# Altium PCB Heist-It.PcbDoc
Units mil, origin at the board's own origin, x right, y up, seen from the top; angles counter-clockwise.
Board outline 6000 x 4000 mil, 2 copper layers (Top Layer, Bottom Layer); 32 components, 29 nets, 106 pads, 0 vias.
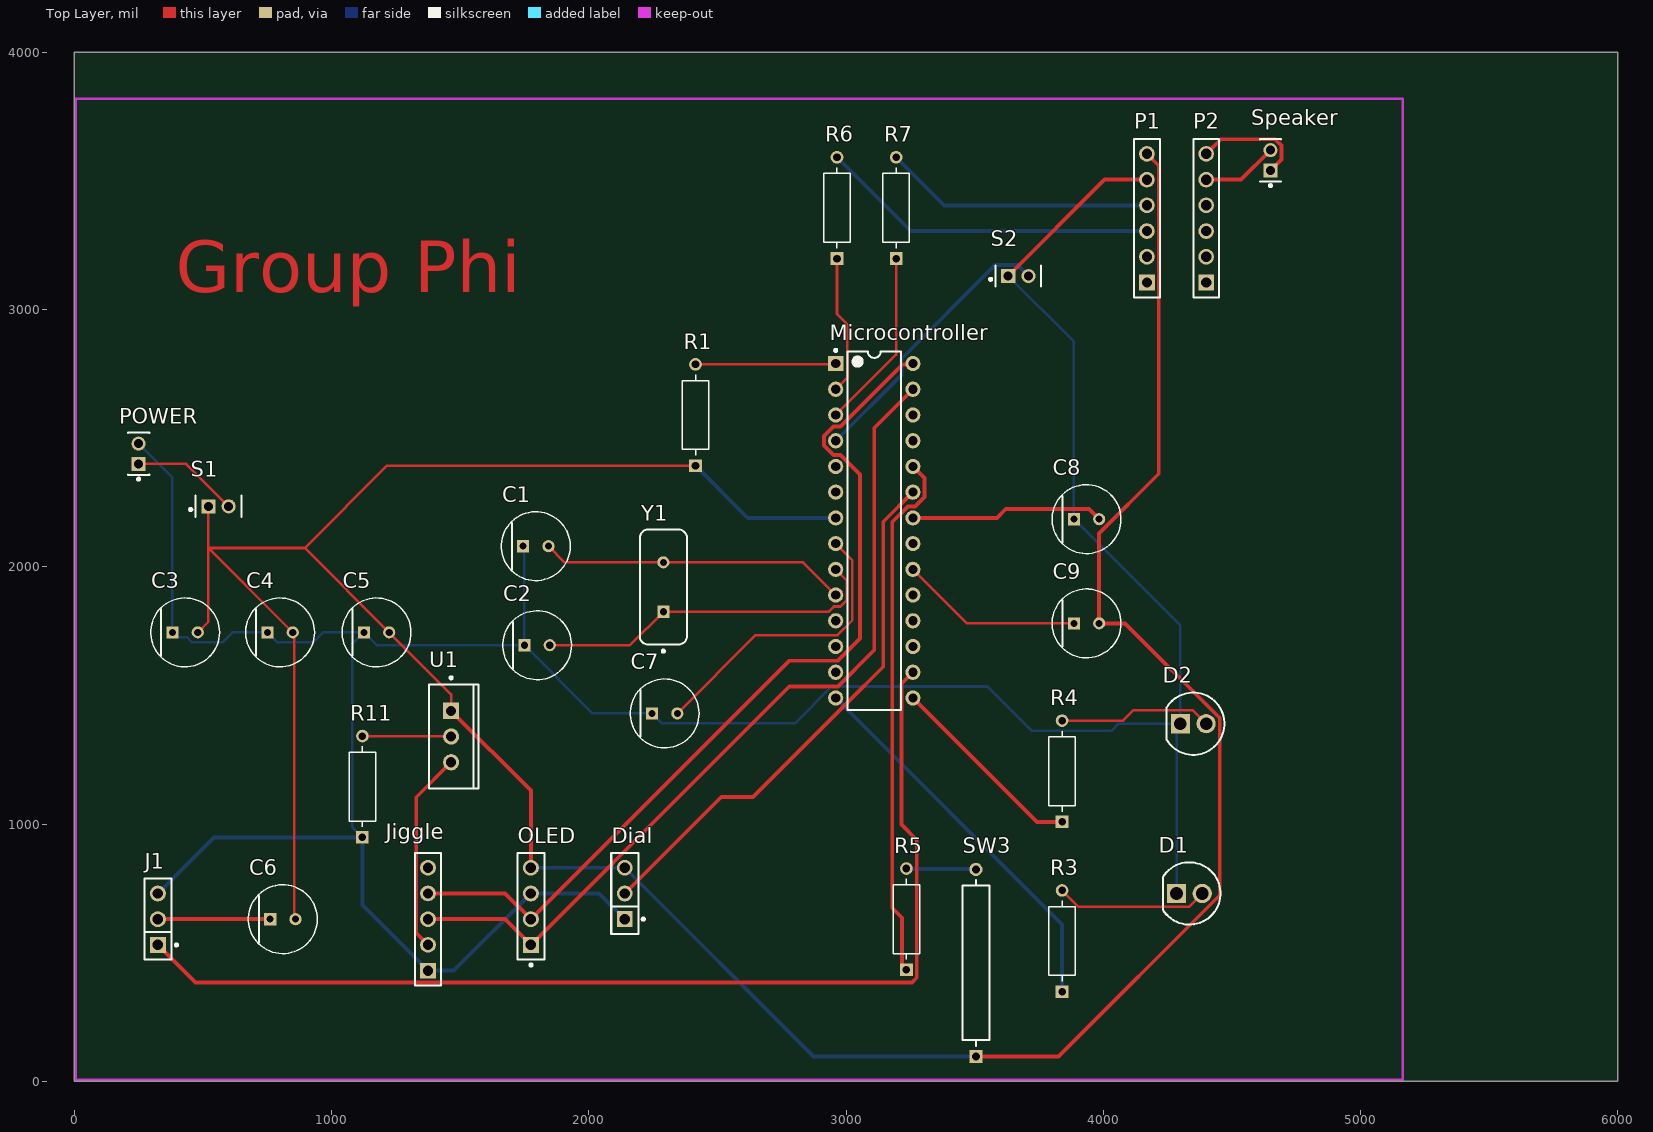
[diagram p0: Top Layer view]
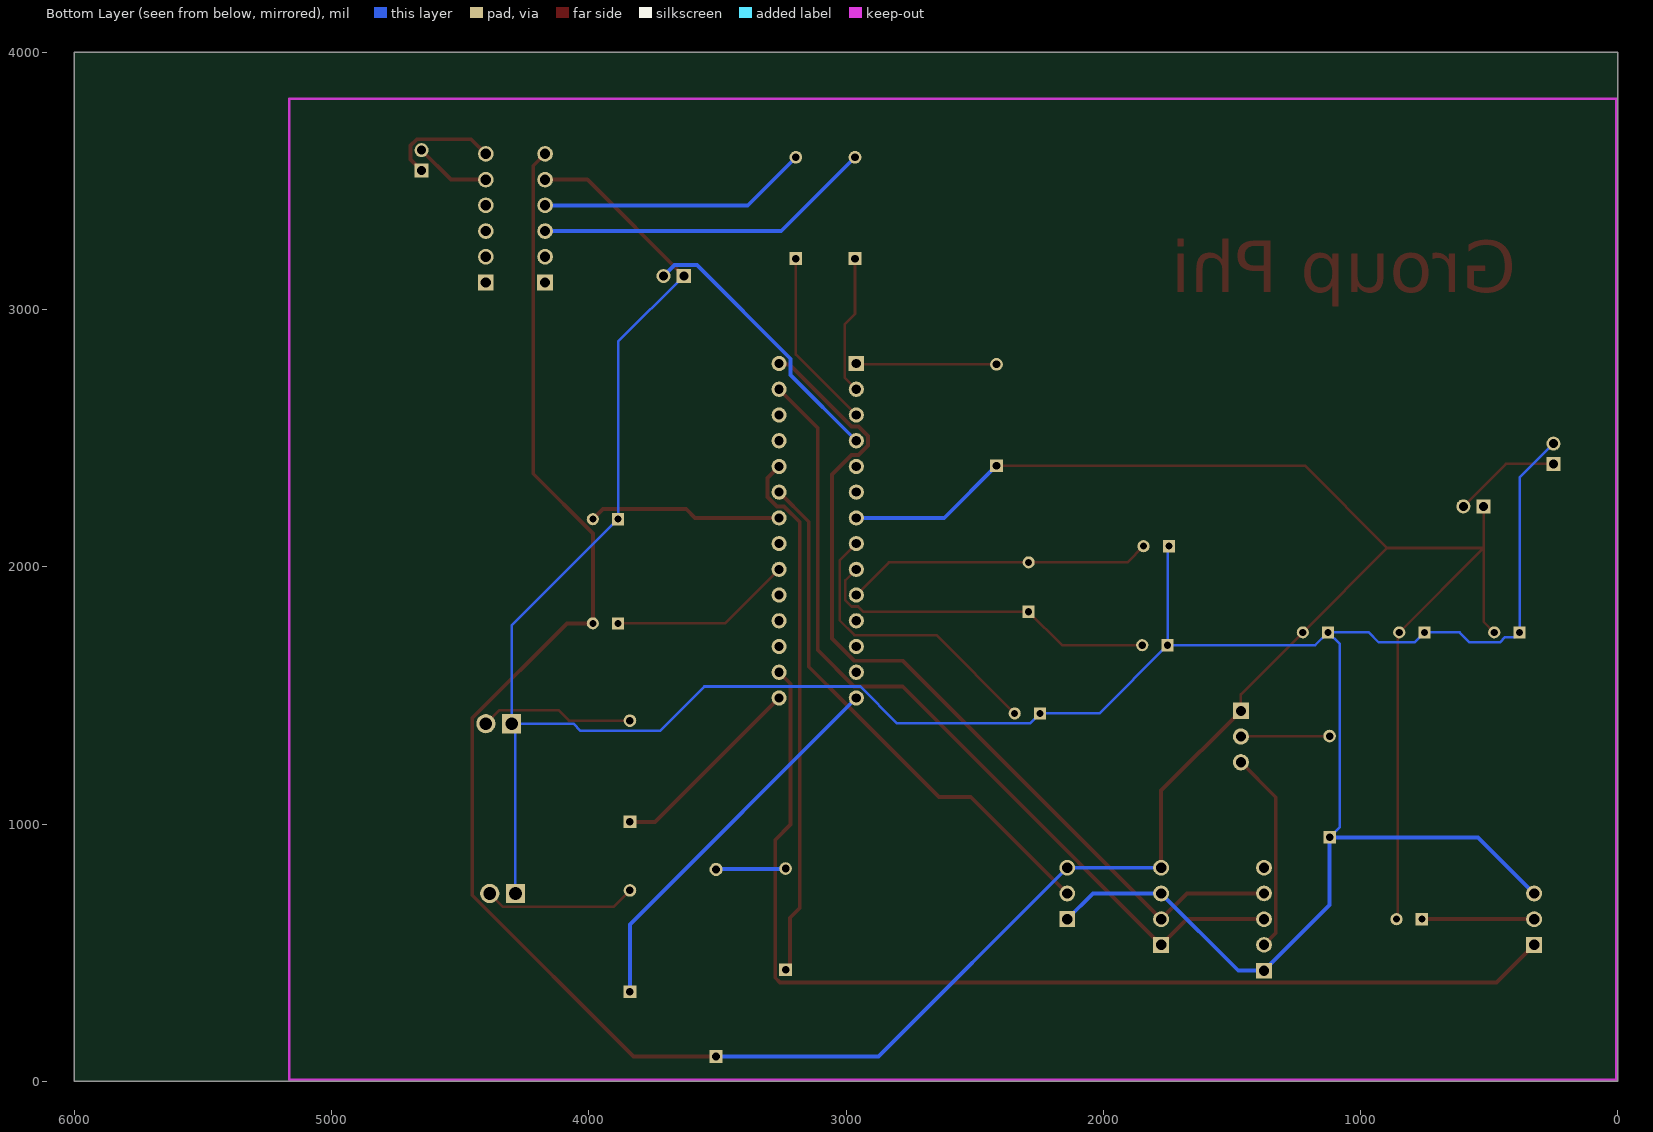
[diagram p1: Bottom Layer view, seen from below]
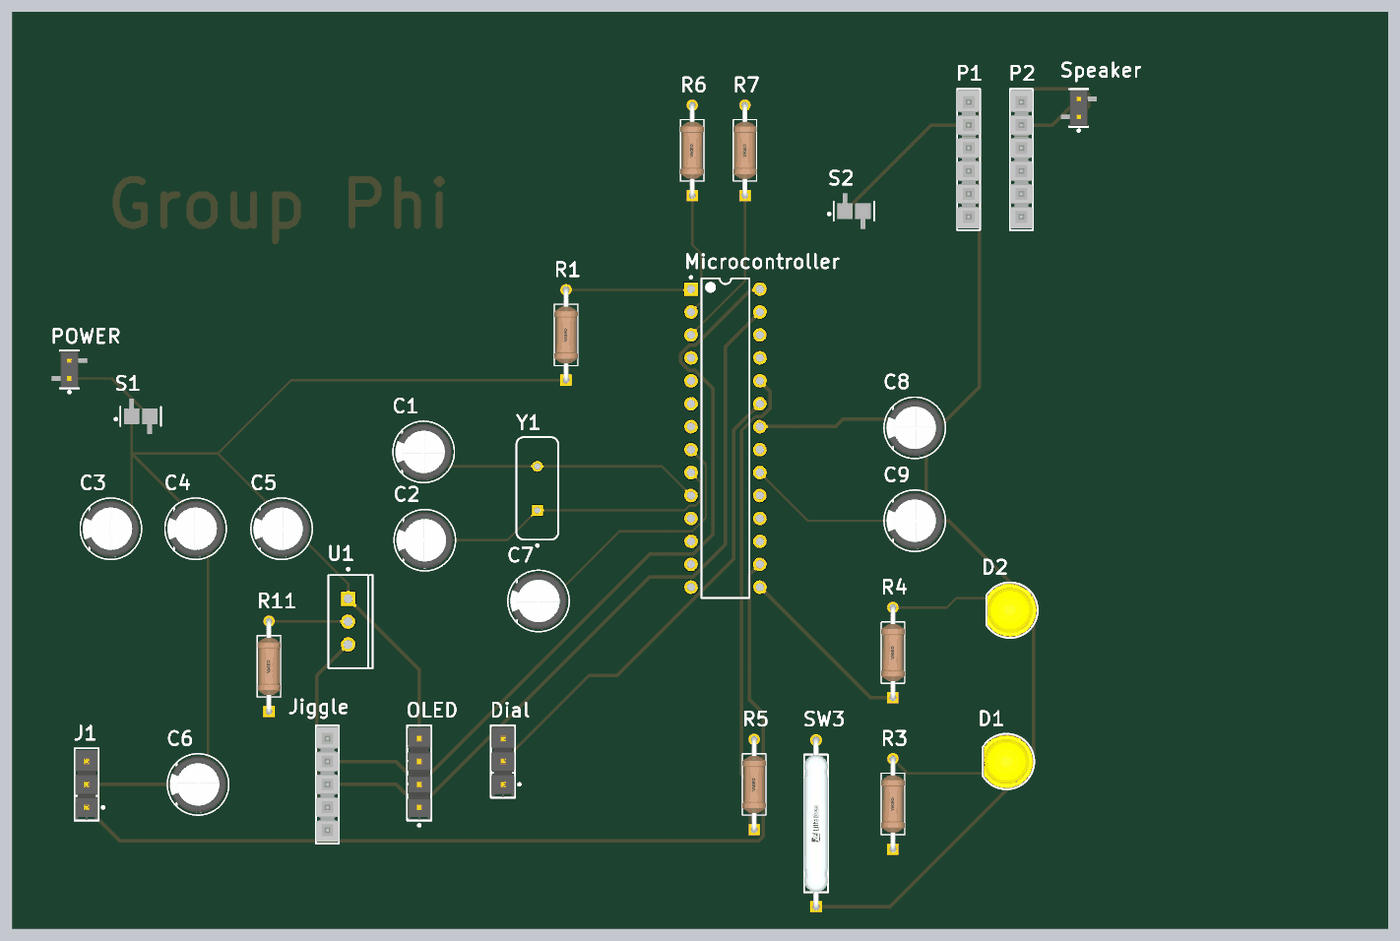
[diagram p2: 3D render of the assembled board from above, using the file's embedded part models]

## Layer stack, top to bottom
Top Solder: solder mask 0.4, Solder Resist, Dk 3.5
Top Layer: signal copper 1.4
Dielectric 1: dielectric 12.6, FR-4, Dk 4.8
Bottom Layer: signal copper 1.4
Bottom Solder: solder mask 0.4, Solder Resist, Dk 3.5

## Board outline
0,0 6000,0 6000,4000 0,4000

## Design rules (kind name [scope] priority, off if disabled: settings)
BoardOutlineClearance [All] p1: gap=11.81 ignorepadtopadclearanceinfootprint=FALSE except(15.75: Arc-SplitBarrior Arc-SplitContinuation Track-SplitBarrior Track-SplitContinuation SMDPad-SplitBarrior SMDPad-SplitContinuation THPad-SplitBarrior THPad-SplitContinuation Via-SplitBarrior Via-SplitContinuation Fill-SplitBarrior Fill-SplitContinuation Poly-SplitBarrior Poly-SplitContinuation Region-SplitBarrior Region-SplitContinuation Text-SplitBarrior Text-SplitContinuation)
Clearance "Clearance Different Nets" [All] p1: gap=7.87 ignorepadtopadclearanceinfootprint=FALSE except(3.5: Arc-Arc Arc-Track Arc-SMDPad Track-Track Track-SMDPad; 5: SMDPad-SMDPad SMDPad-Via THPad-Via Via-Via; 10: Arc-Via Arc-Text Track-Via Track-Text SMDPad-Text THPad-Text Via-Text Fill-Text Poly-Text Region-Text Text-Text; 19.68: THPad-THPad Via-Hole)
Clearance "Clearance Same Nets" [All] p2: gap=7.87 ignorepadtopadclearanceinfootprint=FALSE except(3.5: Arc-Arc Arc-Track Arc-SMDPad Track-Track Track-SMDPad SMDPad-SMDPad; 5: SMDPad-Via THPad-Via; 10: Arc-Via Arc-Text Track-Via Track-Text SMDPad-Text THPad-Text Via-Via Via-Text Fill-Text Poly-Text Region-Text Text-Text)
Clearance "Clearance Bottom Layer" [OnLayer('Bottom Layer')] p3: gap=8 ignorepadtopadclearanceinfootprint=TRUE except(10: Arc-Text Track-Text SMDPad-Text THPad-Text Via-Text Fill-Text Poly-Text Region-Text Text-Text)
Clearance "Clearance Top Layer" [OnLayer('Top Layer')] p4: gap=8 ignorepadtopadclearanceinfootprint=TRUE except(10: Arc-Text Track-Text SMDPad-Text THPad-Text Via-Text Fill-Text Poly-Text Region-Text Text-Text)
HoleSize [All] p1: absolutevalues=TRUE maxlimit=248.03 minlimit=7.87 maxpercent=80.000 minpercent=20.000
MinimumAnnularRing [All] p1: minimumring=5.12
MinimumSolderMaskSliver [All] p1: minsoldermaskwidth=3.94
PolygonConnect PolygonConnect_1 [All] p1: thpad.connectstyle=Relief thpad.reliefconductorwidth=20 thpad.reliefentries=4 thpad.polygonreliefangle="90 Angle" thpad.airgapwidth=10 smdpad.connectstyle=Relief smdpad.reliefconductorwidth=20 smdpad.reliefentries=4 smdpad.polygonreliefangle="90 Angle" smdpad.airgapwidth=10 via.connectstyle=Direct via.reliefconductorwidth=20 via.reliefentries=4 via.polygonreliefangle="90 Angle" via.airgapwidth=10
RoutingCorners [All] p1: cornerstyle=Round minsetback=100 maxsetback=100
RoutingVias [All] p1: holewidth=19.68 width=39.37 viastyle="Through Hole" minholewidth=7.87 minwidth=13.78 maxholewidth=39.37 maxwidth=78.74
SilkToSilkClearance [All] p1: silktosilkclearance=3.94
SilkToSolderMaskClearance [IsPad] p1: minsilkscreentomaskgap=3.94 clearancetoexposedcopper=TRUE
SolderMaskExpansion [All] p1: expansion=4 istentingtop=FALSE
Width [All] p1: maxlimit=100 minlimit=3.5 preferedwidth=15
25 further rules are at their usual default settings.

## Components (designator, comment, footprint, x,y, rotation, side; value= is the part's Value field where it differs from the comment)
C1 "22pF" FP-RAD-TH-D_6_3_0_5-L_11-MFG 1794.21,2080 r0 top
C2 "22pF" FP-RAD-TH-D_6_3_0_5-L_11-MFG 1799.21,1695 r0 top
C3 "100nF" FP-RAD-TH-D_6_3_0_5-L_11-MFG 430.79,1745 r0 top
C4 "10uF" FP-RAD-TH-D_6_3_0_5-L_11-MFG 800,1745 r0 top
C5 "100nF" FP-RAD-TH-D_6_3_0_5-L_11-MFG 1175,1745 r0 top
C6 "100nF" FP-RAD-TH-D_6_3_0_5-L_11-MFG 810.79,630 r0 top
C7 "100nF" FP-RAD-TH-D_6_3_0_5-L_11-MFG 2295,1430 r0 top
C8 "100nF" FP-RAD-TH-D_6_3_0_5-L_11-MFG 3935,2185 r0 top
C9 "100nF" FP-RAD-TH-D_6_3_0_5-L_11-MFG 3935,1780 r0 top
D1 "LED Green" FP-SSL-LX5093YD-MFG 4335,730 r0 top
D2 "LED Red" FP-SSL-LX5093YD-MFG 4350,1390 r0 top
Dial "Rotary Endocer" FP-TSW-103-14-G-S-MFG 2140,730 r90 top
J1 "Servo" FP-TSW-103-14-G-S-MFG 325,630 r90 top
Jiggle "VCNL4040" SMTC-TSW-105-05-X-S 1375,430 r90 top
Microcontroller "ATmega328P-PU" 28P3 3110,2140 r0 top
OLED "OLED" FP-TSW-104-22-G-S-MFG 1775,680 r90 top
P1 "DFPlayer Left" SMTC-TSW-106-17-X-S-LL 4170,3105 r90 top
P2 "DFPlayer Right" SMTC-TSW-106-17-X-S-LL 4400,3105 r90 top
POWER "Power" FP-TMM-102-03-F-S-MFG 250,2439.37 r90 top
R1 "10k" FP-FMP100-MFG 2415,2590 r90 top
R3 "1k" FP-FMP100-MFG 3840,545 r90 top
R4 "1k" FP-FMP100-MFG 3840,1205 r90 top
R5 "10k" FP-FMP100-MFG 3235,630 r90 top
R6 "1k" FP-FMP100-MFG 2965,3395 r90 top
R7 "1k" FP-FMP100-MFG 3195,3395 r90 top
R11 "1k" FP-FMP100-MFG 1120,1145 r90 top
S1 "POWER SWITCH" FP-TMM-102-04-G-S-MFG 560.63,2235 r0 top
S2 "ON/OFF BUTTON" FP-TMM-102-04-G-S-MFG 3670,3130 r0 top
Speaker "Speaker" FP-TMM-102-03-F-S-MFG 4650,3580 r90 top
SW3 "Reed Switch" FP-MLRR-3-17-23-MFG 3505,460 r90 top
U1 "3.3 volt regulator" ONSC-TO-220-3-221AB-01 1465,1340 r0 top
Y1 "16Mhz Crystal" FOX-FOXSLF160-20 2290,1921.06 r90 top

## Footprints (in the part's own frame and the unit in brackets; to place one, negate y for a bottom-side part, rotate by r counter-clockwise, add the part's x,y. Pads: shape width x height; smd on the part's side, far side on the other; paste and mask are expansions set on the pad)
28P3 [mm] "28-Pin Plastic Dual In-Line Package (PDIP)"
  rect 1.5x1.5 hole 0.9: 1(-3.81,16.51)
  round 1.5 hole 0.9: 2(-3.81,13.97) 3(-3.81,11.43) 4(-3.81,8.89) 5(-3.81,6.35) 6(-3.81,3.81) 7(-3.81,1.27) 8(-3.81,-1.27) 9(-3.81,-3.81) 10(-3.81,-6.35) 11(-3.81,-8.89) 12(-3.81,-11.43) 13(-3.81,-13.97) 14(-3.81,-16.51) 15(3.81,-16.51) 16(3.81,-13.97) 17(3.81,-11.43) 18(3.81,-8.89) 19(3.81,-6.35) 20(3.81,-3.81) 21(3.81,-1.27) 22(3.81,1.27) 23(3.81,3.81) 24(3.81,6.35) 25(3.81,8.89) 26(3.81,11.43) 27(3.81,13.97) 28(3.81,16.51)
  silkscreen extent -3.93,-17.7 2.65,17.93, body extent -3.6,-17.65 3.6,17.65, height 4.58
FOX-FOXSLF160-20 [mm] "THD, 2-Leads, Body 11.35x4.65mm"
  rect 1.2x1.2 hole 0.7: 1(-2.44,0)
  round 1.2 hole 0.7: 2(2.44,0)
  silkscreen extent -6.45,-2.32 5.68,2.32, body extent -5.67,-2.32 5.68,2.33, height 3.6
FP-FMP100-MFG [mm]
  rect 1.25x1.25 hole 0.75 paste-2539.97 mask+0: 1(-5,0)
  round 1.25 hole 0.75 paste-2539.97 mask+0: 2(5,0)
  silkscreen extent -3.98,-1.3 3.98,1.3, body extent -5.72,-1.4 5.72,1.4, height 0.25
FP-MLRR-3-17-23-MFG [mm]
  rect 1.3x1.3 hole 0.8 paste-2539.97 mask+0: 1(-9.23,0)
  round 1.3 hole 0.8 paste-2539.97 mask+0: 2(9.23,0)
  silkscreen extent -8.18,-1.33 8.18,1.33, body extent -9.98,-1.43 9.98,1.43, height 0.25
FP-RAD-TH-D_6_3_0_5-L_11-MFG [mm]
  rect 1.2x1.2 hole 0.7 paste-2539.97 mask+0: 1(-1.25,0)
  round 1.2 hole 0.7 paste-2539.97 mask+0: 2(1.25,0)
  silkscreen extent -3.4,-3.4 3.4,3.4, body extent -3.5,-3.5 3.5,3.5, height 0.25
FP-SSL-LX5093YD-MFG [mm]
  rect 1.9x1.9 hole 1.25 paste-2539.97 mask+0: 1(-1.27,0)
  round 1.9 hole 1.25 paste-2539.97 mask+0: 2(1.27,0)
  silkscreen extent -2.63,-3.07 3.07,3.07, body extent -3.17,-3.17 3.17,3.17, height 0.25
FP-TMM-102-03-F-S-MFG [mm]
  rect 1.39x1.39 hole 0.89 paste-2539.97 mask+0: 1(-1,0)
  round 1.39 hole 0.89 paste-2539.97 mask+0: 2(1,0)
  silkscreen extent -2.62,-1.05 2.1,1.05, body extent -2.1,-2.07 2.1,2.07, height 0.25
FP-TMM-102-04-G-S-MFG [mm]
  rect 1.39x1.39 hole 0.89 paste-2539.97 mask+0: 1(-1,0)
  round 1.39 hole 0.89 paste-2539.97 mask+0: 2(1,0)
  silkscreen extent -2.87,-1.05 2.25,1.05
FP-TSW-103-14-G-S-MFG [mm]
  rect 1.57x1.57 hole 1.02 paste-2539.97 mask+0: 1(-2.54,0)
  round 1.57 hole 1.02 paste-2539.97 mask+0: 2(0,0) 3(2.54,0)
  silkscreen extent -4,-1.95 4,1.34, body extent -4.1,-1.44 4.1,1.44, height 0.25
FP-TSW-104-22-G-S-MFG [mm]
  rect 1.57x1.57 hole 1.02 paste-2539.97 mask+0: 1(-3.81,0)
  round 1.57 hole 1.02 paste-2539.97 mask+0: 2(-1.27,0) 3(1.27,0) 4(3.81,0)
  silkscreen extent -5.92,-1.34 5.27,1.34, body extent -5.37,-1.44 5.37,1.44, height 0.25
ONSC-TO-220-3-221AB-01 [mm] "FM, 3-Leads, Body 10.3x4.85mm, Pitch 2.54mm"
  rect 1.6x1.6 hole 1: 1(0,2.54)
  round 1.6 hole 1: 2(0,0) 3(0,-2.54)
  silkscreen extent -2.18,-5.15 2.72,5.92, body extent -2.16,-5.15 2.69,5.15, height 19.68
SMTC-TSW-105-05-X-S [mm] ".025 SQ Post Terminal Strip Assembly, 1x5 Pins, Vertical, 2.54mm Pitch, Male"
  rect 1.55x1.55 hole 1.02: 1(0,0)
  round 1.55 hole 1.02: 2(2.54,0) 3(5.08,0) 4(7.62,0) 5(10.16,0)
  silkscreen extent -1.46,-1.27 11.62,1.27, body extent -1.27,-1.27 11.43,1.27, height 5.21
SMTC-TSW-106-17-X-S-LL [mm] ".025 SQ Post Terminal Strip Assembly, 1x6 Pins, Vertical, 2.54mm Pitch, Male"
  rect 1.55x1.55 hole 1.02: 1(0,0)
  round 1.55 hole 1.02: 2(2.54,0) 3(5.08,0) 4(7.62,0) 5(10.16,0) 6(12.7,0)
  silkscreen extent -1.46,-1.27 14.16,1.27, body extent -1.27,-1.27 13.97,1.27, height 18.29

## Part data
C1 C2 C3 C4 C5 C6 C7 C8 C9: library part CMP-05427-000779-1, "Aluminum Electrolytic Capacitors (Radial Lead Type) 2.2uF ±20% 250V", Capacitance=2.2uF, Case/Package=Radial, Max Operating Temperature=105°C, Min Operating Temperature=-25°C, Package Quantity=2000, Ripple Current=29mA, Tolerance=20%, Voltage Rating=250V, Diameter=6.3mm, Height=11.2mm, Height - Seated (Max)=0.48inch, Lead Diameter=0.5mm, Lead Pitch=2.5mm, Lead/Base Style=Straight, Length=11.2mm, Life (Hours)=2000Hour, Mount="Through Hole", Packaging="Ammo Pack", Radiation Hardening=No, Series=NHG, Termination=Radial, Voltage Rating (DC)=250V
D1 D2: library part CMP-57192-000007-1, "LED YELLOW DIFFUSED T-1 3/4 T/H", Case/Package=Radial, Color=Yellow, Forward Current=20mA, Forward Voltage=2.1V, Max Operating Temperature=85°C, Min Operating Temperature=-40°C, Package Quantity=1000, Diameter=5mm, Dominant Wavelength=568nm, Height=8.6mm, Illumination Color=Yellow, Lead Free="Lead Free", Length=0.5inch, Lens Color=Yellow, Lens Style=Dome, Lens Transparency=Diffused, Luminous Intensity=30mcd, Mount="Through Hole", Number of LEDs=1, Number of Pins=2, Packaging=Bulk, REACH SVHC="No SVHC", RoHS Compliant=Yes, Series=-, Test Current=20mA, Viewing Angle=60°, Wavelength=585nm, Weight=0.01lb, Width=1.5inch
Dial J1: library part CMP-02766-001743-1, "CONN HEADER VERT 3POS 2.54MM", Color=Black, Flammability Rating="UL94 V-0", Max Current Rating=7.6A, Max Operating Temperature=125°C, Max Voltage Rating (AC)=550V, Min Operating Temperature=-55°C, Package Quantity=1, Connector Type=Header, Contact Finish - Mating=GOLD, Contact Material=Bronze, Contact Mating Length=0.32inch, Contact Plating=Gold, Contact Shape=Square, Contact Type="Male Pin", Depth=2.54mm, Fastening Type=Pull, Gender=Male, Height=10.67mm, Housing Color=Black, Housing Material=Polyester, Insulation Color=Black, Insulation Material=PBT, Lead Free="Lead Free", Length=7.62mm, Mount="Through Hole", Number of Contacts=3, Number of Positions=3, Number of Rows=1, Orientation=Straight, Packaging=Bulk, Pitch=2.54mm, Radiation Hardening=No, REACH SVHC="No SVHC", RoHS Compliant=Yes, Series=TSW, Termination=Solder, Width=2.54mm
Jiggle: library part CMP-1024-00366-1, "0.025\" SQ Post Header, Through-hole, Vertical, -55 to 125 degC, 2.54 mm Pitch, 5-Pin, Male, RoHS", Manufacturer=Samtec, PartNumber=TSW-105-05-L-S, Temperature Range="-55 to 125 degC", ComponentLink1Description="Manufacturer URL", ComponentLink1URL=http://www.samtec.com, ComponentLink2Description=Datasheet, ComponentLink2URL=http://www.samtec.com/documents/webfiles/pdf/TSW_TH.PDF, ComponentLink3Description="Package Specification", ComponentLink3URL=http://www.samtec.com/documents/webfiles/cpdf/TSW-XXX-XX-XXX-X-XX-XXX-MKT.pdf, DatasheetVersion=F-214, Mounting Technology=Through-hole, Orientation=Vertical, PackageDescription=".025[0.64] SQ. Post Terminal Strip Assembly", PackageReference=TSW-105-05-X-S, PackageVersion="DM, 8/1988", Pitch="2.54 mm", RoHS=True
Microcontroller: library part CMP-0095-00013-2, "8-bit AVR Microcontroller, 32KB Flash, 1KB EEPROM, 2KB SRAM, 28-pin PDIP, Industrial Grade (-40°C to 85°C)", ComponentLink1Description="Manufacturer URL", ComponentLink1URL=http://www.atmel.com/, ComponentLink2Description="ATmega48A/48PA/88A/88PA/168A/168PA/328/328P Datasheet", ComponentLink2URL=http://www.atmel.com/dyn/resources/prod_documents/8271.pdf, ComponentLink3Description="ATmega48A/48PA/88A/88PA/168A/168PA/328/328P Summary", ComponentLink3URL=http://www.atmel.com/dyn/resources/prod_documents/8271S.pdf, DatasheetVersion="revD, May-2011", PackageDescription="28-lead (0.300\"/7.62mm Wide) Plastic Dual Inline Package (PDIP)", PackageReference=28P3, PackageVersion="revB, Sep-2001", RevisionNote="DatasheetVersion updated. URLs added."
OLED: library part CMP-02766-001236-1, "CONN HEADER VERT 4POS 2.54MM", Contact Material=Bronze, Contact Plating=Gold, Gender=Male, Mount="Through Hole", Number of Contacts=4, Number of Rows=1, Packaging=Bulk, Pitch=2.54mm, Radiation Hardening=No, REACH SVHC="No SVHC", Termination=Solder
P1 P2: library part CMP-1024-00394-1, "0.025\" SQ Post Header, Through-hole, Vertical, -55 to 125 degC, 2.54 mm Pitch, 6-Pin, Male, RoHS", Manufacturer=Samtec, PartNumber=TSW-106-17-L-S-LL, Temperature Range="-55 to 125 degC", ComponentLink1Description="Manufacturer URL", ComponentLink1URL=http://www.samtec.com, ComponentLink2Description=Datasheet, ComponentLink2URL=http://www.samtec.com/documents/webfiles/pdf/TSW_TH.PDF, ComponentLink3Description="Package Specification", ComponentLink3URL=http://www.samtec.com/documents/webfiles/cpdf/TSW-XXX-XX-XXX-X-XX-XXX-MKT.pdf, DatasheetVersion=F-214, Mounting Technology=Through-hole, Orientation=Vertical, PackageDescription=".025[0.64] SQ. Post Terminal Strip Assembly", PackageReference=TSW-106-17-X-S-LL, PackageVersion="DM, 8/1988", Pitch="2.54 mm", RoHS=True
POWER Speaker: library part CMP-02766-001614-1, "CONN HEADER VERT 2POS 2MM", Contact Plating=Gold, Gender=Male, Lead Free="Lead Free", Mount="Through Hole", Number of Contacts=2, Number of Rows=1, Packaging=Bulk, Pitch=2mm, Radiation Hardening=No, RoHS Compliant=Yes, Termination=Solder
R1 R3 R4 R5 R6 R7 R11: library part CMP-00621-25629781-1, "Resistor, 1 kOhm, ± 5%, 1 W, Axial Leaded, Metal Film, High Power Flame Proof", Case/Package=Conformal, Max Operating Temperature=155°C, Min Operating Temperature=-55°C, Power Rating=1W, Resistance=1kΩ, Temperature Coefficient=100ppm/°C, Tolerance=5%, Composition="Metal Film", Diameter=2.4mm, Lead Free="Lead Free", Length=6.3mm, Military Standard=Not, Mount="Through Hole", Radiation Hardening=No, RoHS=Compliant, Schedule B="8533210090, 8533210090", Termination=Axial
S1 S2: library part CMP-02766-001609-1, "2MM TERMINAL STRIP", Housing Color=Black, Max Current Rating=3.9A, Max Operating Temperature=125°C, Max Voltage Rating (AC)=500V, Min Operating Temperature=-55°C, Contact Material=Bronze, Contact Plating=Gold, Depth=1.97mm, Gender=Male, Housing Material=Polymer, Length=4mm, Number of Contacts=2, Number of Rows=1, Orientation=Straight, Packaging=Bulk, Pitch=2mm, Radiation Hardening=No, RoHS Compliant=Yes, Termination=Solder
SW3: library part CMP-08625-000005-1, "SWITCH REED SPST-NO 700MA 140V", Capacitance=0.4pF, Max Operating Temperature=125°C, Min Operating Temperature=-40°C, Package Quantity=100, Power Rating=20W, Lead Free="Lead Free", Length=56.6mm, Mount="Through Hole", Operate Time=0.7ms, Packaging=Bulk, Release Time=0.2ms, Series=MLRR-3, Termination=Axial, Throw Configuration=SPST
U1: library part CMP-2000-04928-1, "Positive Voltage Regulator, 1 A, 5 V, 0 to 125 degC, 3-Pin TO-220, RoHS, Tube", Current, Output, Maximum=1A, Current, Quiescent Supply=6.5mA, Current, Supply=3.2mA, Dropout Voltage=2V, Manufacturer="ON Semiconductor", Package Description="3-Pin Flange Mount, Vertical Straight Lead, Body 9.97 x 4.445 mm, Pitch 2.54 mm", Package Reference=TO-220-3-221AB-01, Package Type=TO-220, Package Version="Rev. A, 11/2010", Resistance, Thermal, Junction to Case=5degC/W, Temperature, Operating, Maximum=+125degC, Temperature, Operating, Minimum=0degC, Temperature, Operating, Range=0to+125degC, Voltage, Input Range=Maximumof35V, Voltage, Input, High Level=35V, Voltage, Noise=10μV/V, Voltage, Output=5V, Datasheet URL=http://www.onsemi.com/pub_link/Collateral/MC7800-D.PDF, Datasheet Version="Rev. 27, 11/2014", Dimensions=10.28x4.82x15.75mm, Dropout Voltage Measurement Current=1A, Height=15.75mm, Length=10.28mm, Line Regulation=20mV, Load Regulation=25mV, Manufacturer URL=http://www.onsemi.com/, Mounting Type=ThroughHole, Number of Outputs=1, Number of Pins=3, Output Type=Fixed, Polarity=Positive, Regulation, Line=0.5mV, Regulation, Load=1.3mV, Regulator Function=Standard, Regulator Type=PositiveVoltageOut, Type=VoltageRegulator, Voltage, Dropout=2V, Voltage, Supply=35V, Width=4.82mm
Y1: library part CMP-1749-00003-1, "Resistance Weld Thru-Hole Crystal, 16 MHz, -20 to 70 degC, 2-Pin THD, RoHS, Bulk", Case\Package=Axial, Max Operating Temperature="155 degC", Min Operating Temperature="-55 degC", Package Quantity=200, Power Rating="250 mW", Resistance="221 kohm", Tolerance=1%, Voltage Rating="250 V", ComponentLink1Description="Manufacturer URL", ComponentLink1URL=http://www.foxonline.com/, ComponentLink2Description=Datasheet, ComponentLink2URL=http://www.foxonline.com/pdfs/hc49slf.pdf, DatasheetVersion=Mar-15, Length="0.248 inch", Mount="Through Hole", PackageDescription="2-Pin Through Hole Device, Body 11.35 x 4.65 mm", PackageReference=FOXSLF160-20, Packaging=Bulk, RoHSCompliant=true

## Nets (pads, with @x,y where several pads share a name; then routed paths per layer and width w, separated by ;. In a path a pad name is that pad's centre, name@x,y a point inside that pad or via, vN(x,y) a via of type N, cw(c..) or ccw(c..) an arc to the next point about the centre after c; other vN are vias at no path point)
GND: C1.1 C2.1 C3.1 C4.1 C5.1 C7.1 C8.1 D1.1 D2.1 Dial.1 J1.3 Jiggle.1 OLED.3 P1.5 POWER.2 R11.1 S2.1 | length 12096.4
  Top Layer w15: S2.1 4005.63,3505 P1.5
  Bottom Layer w10: POWER.2 381.57,2347.17 C3.1 400.2,1726.38 438.1,1726.38 458.1,1706.38 575.82,1706.38 614.44,1745 C4.1 789.41,1706.38 928.98,1706.38 967.6,1745 C5.1 ; R11.1 1080.39,987.76 1080.39,1699.61 C5.1 ; C1.1 1750,2075 C2.1 ; S2.1 3885.79,2874.84 C8.1 4300,1770.79 D2.1 ; D1.1 4285,1375 D2.1 ; C5.1 1175.79,1695 C2.1 ; C2.1 2015,1430 C7.1 2284.41,1391.38 2801.38,1391.38 2944.53,1534.53 3550.5,1534.53 3722.78,1362.24 4031.72,1362.24 4059.47,1390 D2.1
  Bottom Layer w15: J1.3 543.15,948.15 R11.1 1120,685 Jiggle.1 1475,430 OLED.3 2040,730 Dial.1
NetC1_2: C1.2 Microcontroller.10 Y1.2 | length 1195.3
  Top Layer w10: C1.2 1906.3,2017.13 Y1.2 2832.87,2017.13 Microcontroller.10
NetC2_2: C2.2 Microcontroller.9 Y1.1 | length 1364.4
  Top Layer w10: C2.2 2160,1695 Y1.1 2932.03,1825 2952.5,1845.47 2978.44,1845.47 3002.4,1869.43 3002.4,1947.6 Microcontroller.9
NetC3_2: C3.2 C4.2 C5.2 C6.2 C9.2 Dial.3 Microcontroller.7 OLED.4 P1.6 R1.1 S1.1 SW3.1 U1.1 | length 12843.6
  Top Layer w10: C3.2 521.26,1786.26 521.26,2072.95 ; S1.1 521.26,2072.95 ; C6.2 854.61,635.39 854.61,1739.61 C4.2 521.26,2072.95 ; U1.1 1465,1504.21 C5.2 896.26,2072.95 ; R1.1 1216.46,2393.15 896.26,2072.95 ; 521.26,2072.95 896.26,2072.95
  Top Layer w15: U1.1 1775,1130 OLED.4 ; SW3.1 3826.25,96.61 4452.78,723.14 4452.78,1411.86 4084.64,1780 C9.2 3984.21,2129.85 4215.89,2361.52 4215.89,3559.11 P1.6
  Bottom Layer w15: OLED.4 Dial.3 2873.39,96.61 SW3.1 ; R1.1 2618.15,2190 Microcontroller.7
NetC6_1: C6.1 J1.2 | length 436.6
  Top Layer w15: J1.2 C6.1
NetC7_2: C7.2 Microcontroller.8 | length 1155.6
  Top Layer w10: C7.2 2648.74,1734.53 2967.5,1734.53 3025,1792.03 3025,2025 Microcontroller.8
NetC8_2: C8.2 Microcontroller.22 | length 754.4
  Top Layer w15: Microcontroller.22 3587.21,2190 3621.2,2224 3945.22,2224 C8.2
NetC9_1: C9.1 Microcontroller.20 | length 712.8
  Top Layer w10: Microcontroller.20 3470,1780 C9.1
NetD1_2: D1.2 R3.2 | length 593.3
  Top Layer w10: R3.2 3904.25,677.6 4332.6,677.6 D1.2
NetD2_2: D2.2 R4.2 | length 598.5
  Top Layer w10: R4.2 4076.84,1401.85 4117.39,1442.4 4347.6,1442.4 D2.2
NetDial_2: Dial.2 Microcontroller.23 | length 2096.3
  Top Layer w15: Dial.2 2515.18,1105.18 2638.68,1105.18 2761.13,1227.63 3006.03,1472.53 3145,1611.5 3145,2175 Microcontroller.23
NetJ1_1: J1.1 Microcontroller.16 | length 4249.1
  Top Layer w15: J1.1 470.89,384.11 3256.92,384.11 3274.98,402.18 3274.98,937.74 3215.1,997.62 3215.1,1545.1 Microcontroller.16
NetJiggle_2: Jiggle.2 U1.3 | length 785.3
  Top Layer w15: Jiggle.2 1329.11,575.89 1329.11,1104.11 U1.3
NetJiggle_3: Jiggle.3 Microcontroller.27 OLED.1 | length 3327.2
  Top Layer w15: Jiggle.3 1675,630 OLED.1 2093.72,848.72 2093.72,849.17 2779.45,1534.9 2968.4,1534.9 3109.99,1676.49 3109.99,2539.99 Microcontroller.27
NetJiggle_4: Jiggle.4 Microcontroller.28 OLED.2 | length 3495.9
  Top Layer w15: Jiggle.4 1675,730 OLED.2 2779.9,1634.9 2968.4,1634.9 3055,1721.5 3055,2358.5 2978.6,2434.9 2951.6,2434.9 2915.1,2471.4 2915.1,2508.6 2951.6,2545.1 2978.6,2545.1 3219.47,2785.97 3255.97,2785.97 Microcontroller.28
NetMicrocontroller_1: Microcontroller.1 R1.2 | length 546.3
  Top Layer w10: R1.2 2956.85,2786.85 Microcontroller.1
NetMicrocontroller_2: Microcontroller.2 R6.1 | length 543
  Top Layer w10: Microcontroller.2 3004.53,2734.53 3004.53,2943.41 2965,2982.94 R6.1
NetMicrocontroller_3: Microcontroller.3 R7.1 | length 705.5
  Top Layer w10: Microcontroller.3 3195,2825 R7.1
NetMicrocontroller_4: Microcontroller.4 S2.2 | length 1087.1
  Bottom Layer w15: Microcontroller.4 3215.1,2745.1 3215.1,2808.6 3579.24,3172.74 3666.63,3172.74 S2.2
NetMicrocontroller_14: Microcontroller.14 R3.1 | length 1506.4
  Bottom Layer w15: Microcontroller.14 3840,610 R3.1
NetMicrocontroller_15: Microcontroller.15 R4.1 | length 779.6
  Top Layer w15: Microcontroller.15 3741.85,1008.15 R4.1
NetMicrocontroller_24: Microcontroller.24 R5.1 | length 2065.8
  Top Layer w15: R5.1 3217.89,450.26 3217.89,635.4 3180,673.29 3180,2173.5 3241.4,2234.9 3268.4,2234.9 3304.9,2271.4 3304.9,2345.1 Microcontroller.24
NetP1_3: P1.3 R6.2 | length 1323.8
  Bottom Layer w15: R6.2 3251.85,3305 P1.3
NetP1_4: P1.4 R7.2 | length 1052.4
  Bottom Layer w15: R7.2 3381.85,3405 P1.4
NetP2_5: P2.5 Speaker.2 | length 297.4
  Top Layer w15: P2.5 4535.63,3505 Speaker.2
NetP2_6: P2.6 Speaker.1 | length 440.9
  Top Layer w15: P2.6 4457.11,3662.11 4667.7,3662.11 4692.74,3637.07 4692.74,3583.37 Speaker.1
NetPOWER_1: POWER.1 S1.2 | length 418.3
  Top Layer w10: POWER.1 435,2400 S1.2
NetR5_2: R5.2 SW3.2 | length 271.4
  Bottom Layer w15: R5.2 3236.73,825.12 3503.27,825.12 SW3.2
NetR11_2: R11.2 U1.2 | length 345.8
  Top Layer w10: R11.2 1120.93,1340.93 1464.07,1340.93 U1.2
pads on no net: Jiggle.5 Microcontroller.5 Microcontroller.6 Microcontroller.11 Microcontroller.12 Microcontroller.13 Microcontroller.17 Microcontroller.18 Microcontroller.19 Microcontroller.21 Microcontroller.25 Microcontroller.26 P1.1 P1.2 P2.1 P2.2 P2.3 P2.4

## Keep-outs
Keep-Out Layer:
  lines w10: 5,5 5165,5 5165,3820 5,3820 5,5

## Other copper
Top Layer:
  text "Group Phi" at 395,3066.65 h200